# Altium PCB kernel.PcbDoc (part 7 of 7)
Units mil, origin at the board's own origin, x right, y up, seen from the top; angles counter-clockwise.
Board outline 2360 x 2450.34 mil, 6 copper layers (Top Layer, GND, SIGNAL, POWER, GND1, Bottom Layer), stack 32.112 mil thick; 150 components, 174 nets, 684 pads, 710 vias.
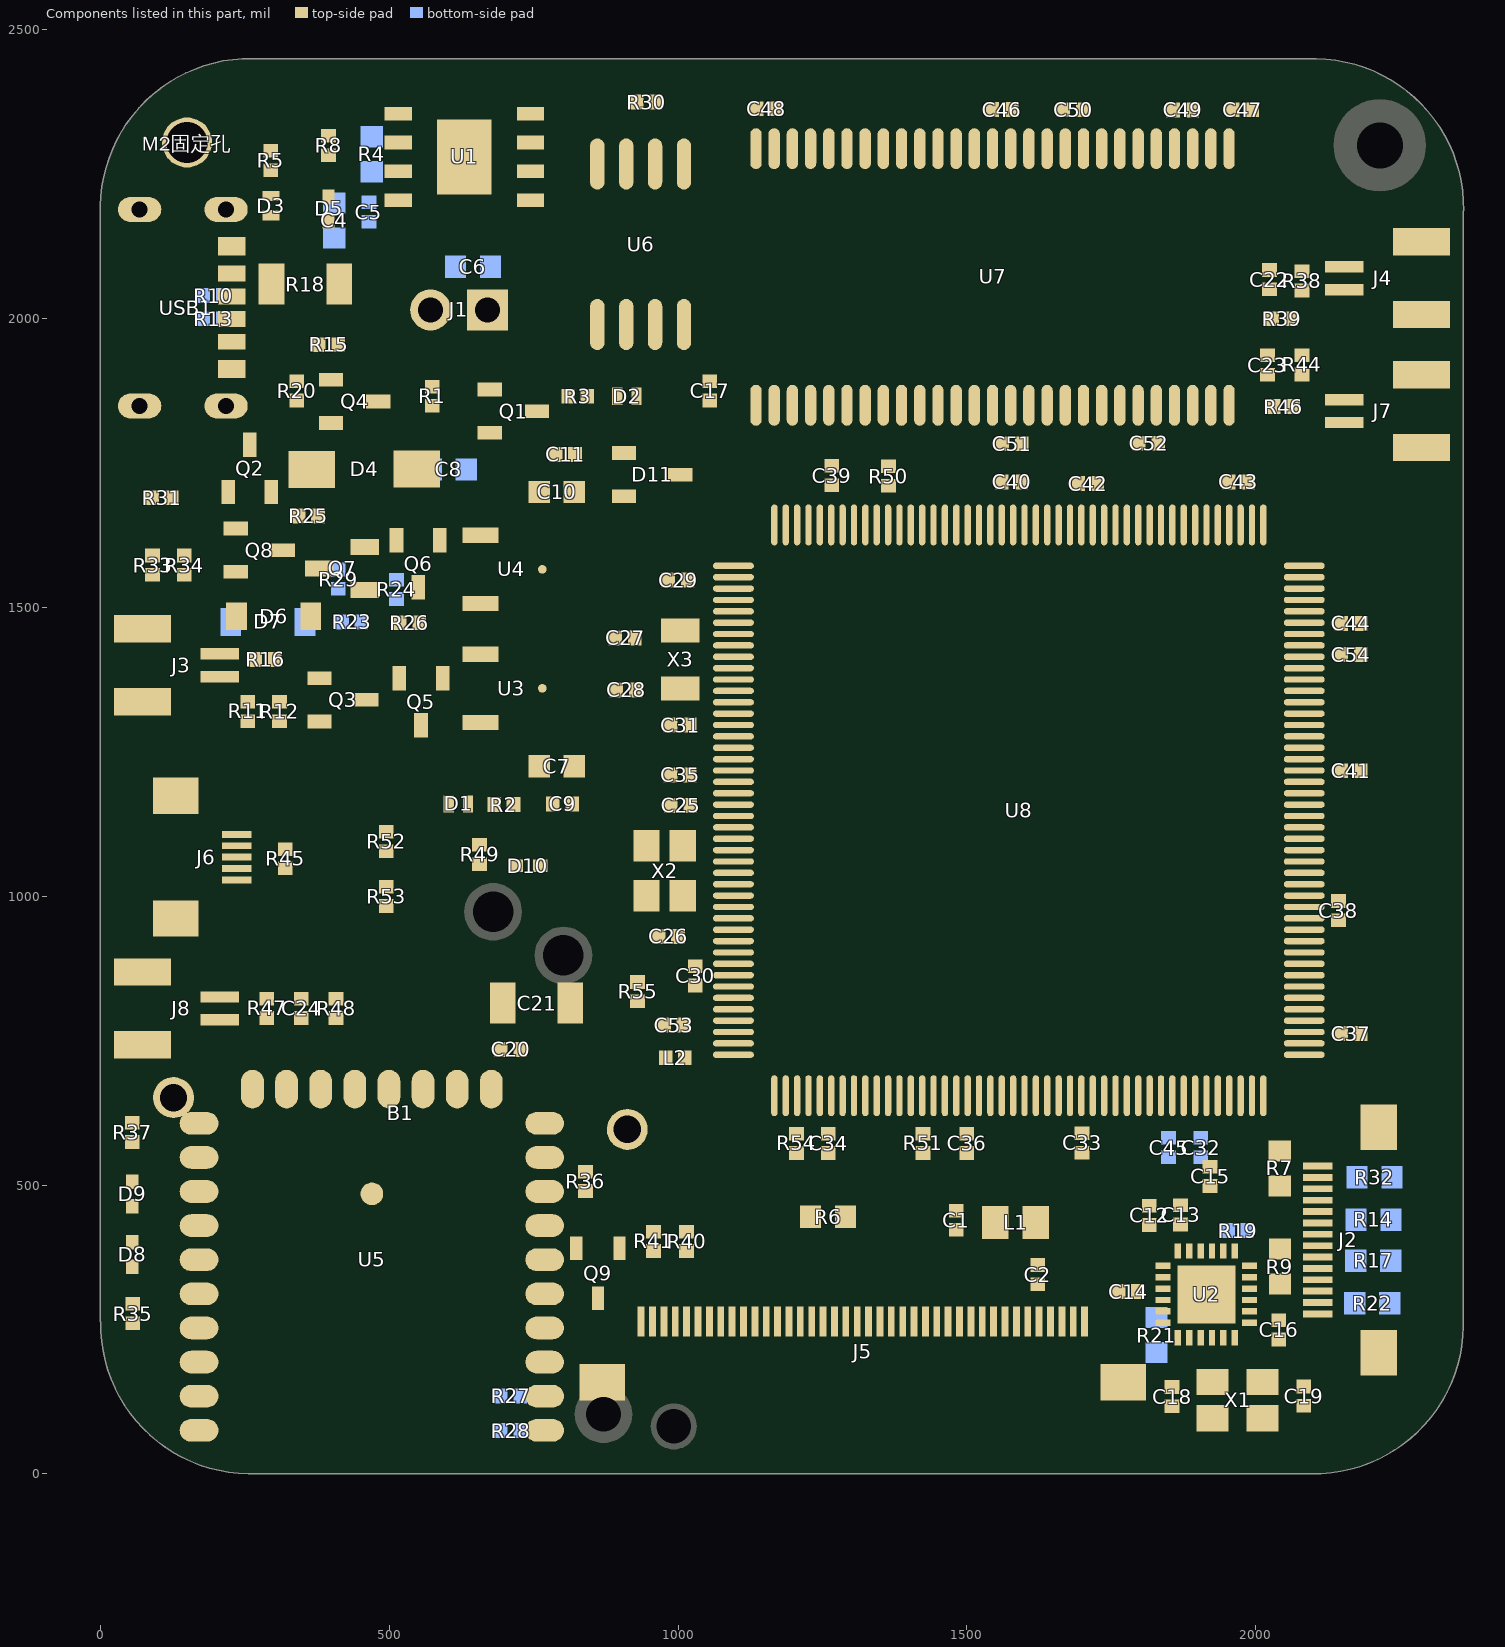
[diagram p10: the components of this part, seen from the top]

## Silkscreen, mask and mechanical layers (free items; w line width, h text height)
Top Overlay:
  text "VCCM闭环走线需要修改吗" at 647.63,2830.62 h100
  text "LCD接口未修改" at 649.64,2705.76 h100
  text "GND" at 2046.49,2385.62 h80
  text "-" at 531.27,2179.49 h200 r90
  text "+" at 753.8,2135.15 h150
  text "Designed by Snug Chrono team" at 2271.36,1695.62 h80 r270
  text "开机" at 25.3,1259.16 h80
  text "LED" at 736.78,981.54 h80
  text "3V3" at 615.12,943.68 h80 r90
  text "GND" at 733.51,931.69 h80
  text "升压输入" at 422.43,872.96 h80
Bottom Overlay:
  text "15V" at 915.91,170.11 h80
  text "GND" at 1086.19,148.24 h80
  text "升压输出" at 1308.86,63.39 h80
Mechanical 1:
  lines w10: 0,263.64 0,2195 ; 0.34,263.3 ccw(c259.49,259.49) 255.68,0.34 2096.36,0.34 2096.7,0 ccw(c2100.51,259.15) 2359.66,255.34 2359.66,2186.7 ; 0.34,2194.66 0,2195 ; 2104.32,2450.34 262.96,2450.34 ccw(c259.15,2191.19) 0,2195 ; 2104.66,2450 cw(c2100.85,2190.85) 2360,2187.04

## Dimensions
0,0 to 262.96,2450.34 on Top Overlay
0,0 to 2359.66,255.34 on Top Overlay